# Altium PCB PortalPCB.PcbDoc
Units mm, origin at the board's own origin, x right, y up, seen from the top; angles counter-clockwise.
Board outline 100 x 75 mm, 2 copper layers (Top Layer, Bottom Layer); 103 components, 80 nets, 361 pads, 147 vias.
Unrouted connection lines stored in the file: 197.
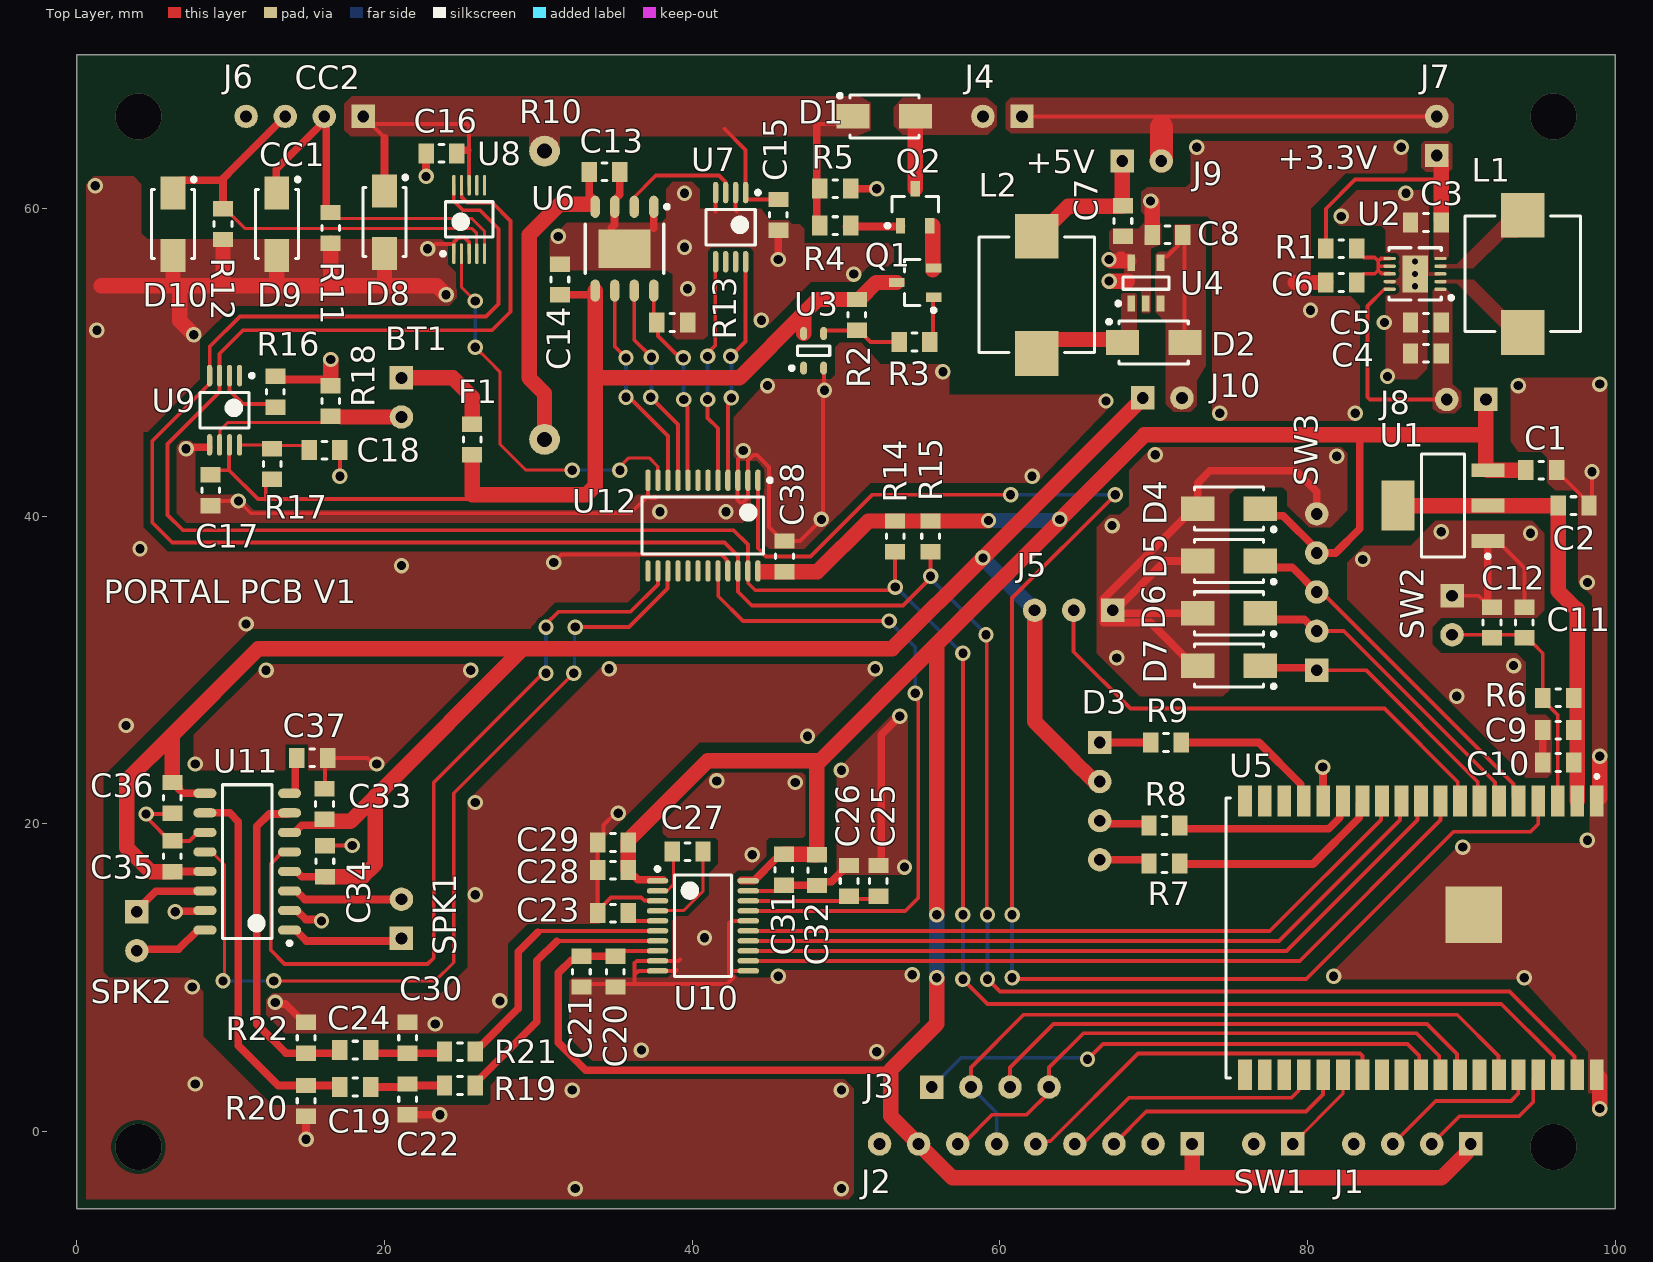
[diagram p0: Top Layer view]
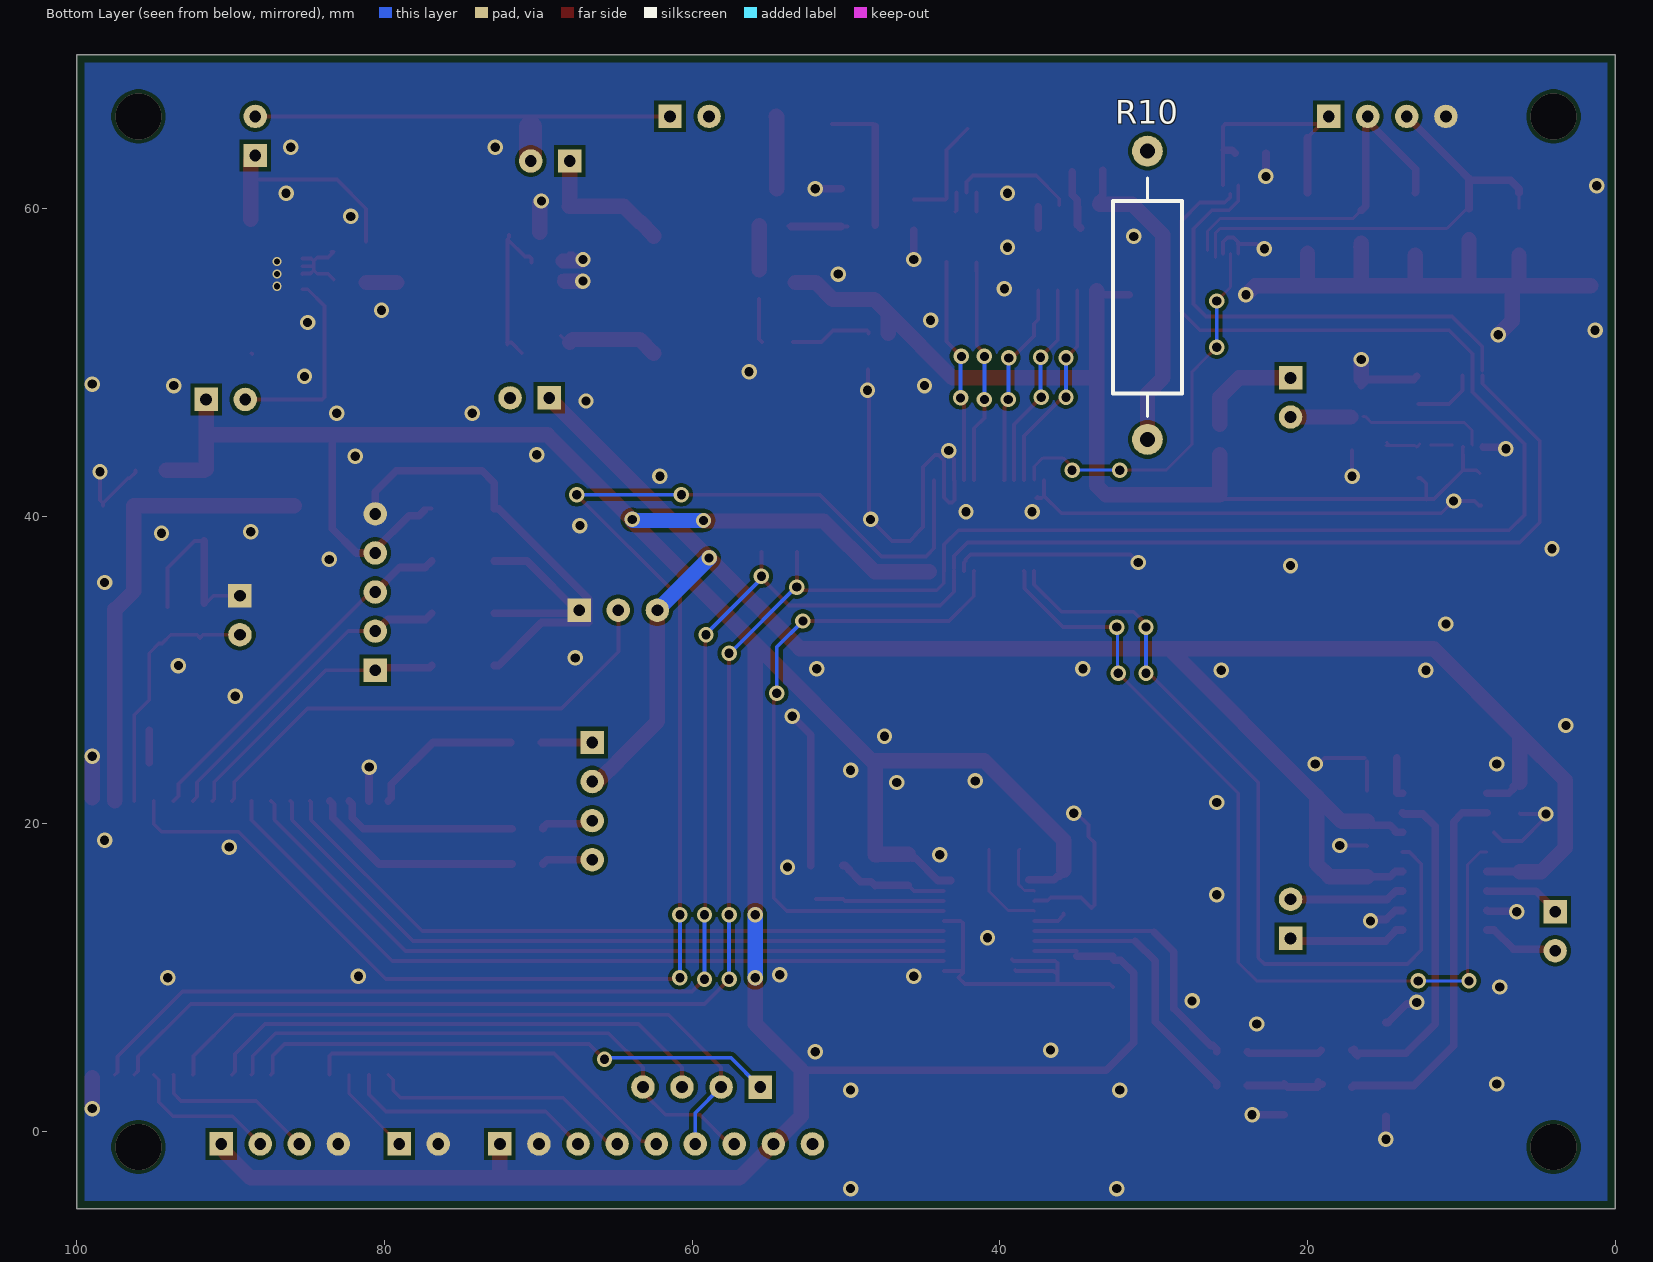
[diagram p1: Bottom Layer view, seen from below]

## Layer stack, top to bottom
Top Solder: solder mask 0.0102, Solder Resist, Dk 3.5
Top Layer: signal copper 0.0356
Dielectric 1: dielectric 0.32, FR-4, Dk 4.8
Bottom Layer: signal copper 0.0356
Bottom Solder: solder mask 0.0102, Solder Resist, Dk 3.5

## Board outline
0,-5 100,-5 100,70 0,70

## Design rules (kind name [scope] priority, off if disabled: settings)
Clearance [All] p1: gap=0.25 ignorepadtopadclearanceinfootprint=FALSE
HoleSize [All] p1: absolutevalues=TRUE maxlimit=6.3 minlimit=0.5 maxpercent=80.000 minpercent=20.000
HoleToHoleClearance [All] p1: gap=0.2 allowstackedmicrovias=TRUE
MinimumSolderMaskSliver [All] p1: minsoldermaskwidth=0.2
PolygonConnect [All] p1: connectstyle=Direct reliefconductorwidth=0.254 reliefentries=4 polygonreliefangle="90 Angle" airgapwidth=0.254
RoutingVias [All] p1: holewidth=0.6 width=1 viastyle="Through Hole" minholewidth=0.15 minwidth=0.25 maxholewidth=0.6 maxwidth=1
SilkToSilkClearance [All] p1: silktosilkclearance=0.2
SilkToSolderMaskClearance [IsPad] p1: minsilkscreentomaskgap=0.2 clearancetoexposedcopper=TRUE
SolderMaskExpansion [All] p1: expansion=0.102 istentingtop=FALSE
SupplyNets "Schematic Supply Nets_6" [InNet('+3.3U')] p1: voltage=0.000
SupplyNets "Schematic Supply Nets_5" [InNet('VBAT')] p2: voltage=0.000
SupplyNets "Schematic Supply Nets_4" [InNet('+5')] p3: voltage=0.000
SupplyNets "Schematic Supply Nets_3" [InNet('GND')] p4: voltage=0.000
SupplyNets "Schematic Supply Nets_2" [InNet('VIN')] p5: voltage=0.000
SupplyNets "Schematic Supply Nets_1" [InNet('+3.3')] p6: voltage=0.000
SupplyNets "Schematic Supply Nets" [InNet('VBUS')] p7: voltage=0.000
Width Width_Power [InNetClass('Power')] p1: maxlimit=1.5 minlimit=0.2 preferedwidth=0.5 minimp=50.000000 maximp=50.000000 favimp=50.000000
Width [All] p2: maxlimit=0.5 minlimit=0.2 preferedwidth=0.25 minimp=50.000000 maximp=50.000000 favimp=50.000000
25 further rules are at their usual default settings.

## Classes and differential pairs
net class Power: +3.3 +3.3U +5 GND NetBT1_1 NetBT1_2 NetC3_2 NetC7_2 NetC13_2 NetD1_2 NetD2_1 NetL1_1 NetL1_2 NetQ1_2 VBAT VIN
component class Power: C1 C2 C3 C4 C5 C6 C7 C8 D1 D2 J4 J7 J8 J9 J10 L1 L2 Q1 Q2 R1 R2 R3 R4 R5 U1 U2 U3 U4
component class Main: C9 C10 C11 C12 C38 D3 D4 D5 D6 D7 J1 J2 J3 J5 R6 R7 R8 R9 R14 R15 SW1 SW2 SW3 U5 U12
component class Battery: BT1 C13 C14 C15 C16 C17 C18 D8 D9 D10 F1 J6 R10 R11 R12 R13 R16 R17 R18 U6 U7 U8 U9
component class Audio: C19 C20 C21 C22 C23 C24 C25 C26 C27 C28 C29 C30 C31 C32 C33 C34 C35 C36 C37 R19 R20 R21 R22 SPK1 SPK2 U10 U11

## Components (designator, comment, footprint, x,y, rotation, side; value= is the part's Value field where it differs from the comment)
BT1 "18650" "1x2 Header" 21.1,49 r270 top
C1 "Capacitor_1uF" "CAP 0805" 95.2,43 r180 top
C2 "Capacitor_4.7uF" "CAP 0805" 97.3,40.7 r180 top
C3 "Capacitor_10uF" "CAP 0805" 87.7,59.1 r0 top
C4 "Capacitor_10uF" "CAP 0805" 87.7,50.6 r0 top
C5 "Capacitor_10uF" "CAP 0805" 87.7,52.6 r0 top
C6 "Capacitor_100nF" "CAP 0805" 82.2,55.2 r0 top
C7 "Capacitor_2.2uF" "CAP 0805" 68,59.2 r90 top
C8 "Capacitor_22uF" "CAP 0805" 70.9,58.3 r0 top
C9 "Capacitor_22uF" "CAP 0805" 96.3,26.1 r0 top
C10 "Capacitor_1uF" "CAP 0805" 96.3,24 r0 top
C11 "Capacitor_1uF" "CAP 0805" 94.1,33.1 r270 top
C12 "Capacitor_100nF" "CAP 0805" 92,33.1 r270 top
C13 "Capacitor_10uF" "CAP 0805" 34.3,62.4 r180 top
C14 "Capacitor_10uF" "CAP 0805" 31.4,55.4 r270 top
C15 "Capacitor_100nF" "CAP 0805" 45.6,59.6 r90 top
C16 "Capacitor_100nF" "CAP 0805" 23.7,63.6 r0 top
C17 "Capacitor_1uF" "CAP 0805" 8.7,41.7 r270 top
C18 "Capacitor_220nF" "CAP 0805" 16.1,44.3 r180 top
C19 "Capacitor_22uF" "CAP 0805" 18.1,2.9 r180 top
C20 "Capacitor_100nF" "CAP 0805" 35,10.4 r270 top
C21 "Capacitor_10uF" "CAP 0805" 32.8,10.4 r270 top
C22 "Capacitor_100nF" "CAP 0805" 21.5,2.1 r90 top
C23 "Capacitor_2.2uF" "CAP 0805" 34.854,14.2 r0 top
C24 "Capacitor_22uF" "CAP 0805" 18.1,5.3 r180 top
C25 "Capacitor_10uF" "CAP 0805" 52.1,16.3 r270 top
C26 "Capacitor_100nF" "CAP 0805" 50.2,16.3 r270 top
C27 "Capacitor_2.2uF" "CAP 0805" 39.7,18.2 r180 top
C28 "Capacitor_100nF" "CAP 0805" 34.854,17 r180 top
C29 "Capacitor_10uF" "CAP 0805" 34.854,18.8 r180 top
C30 "Capacitor_100nF" "CAP 0805" 21.5,6.1 r270 top
C31 "Capacitor_10uF" "CAP 0805" 45.959,17.025 r270 top
C32 "Capacitor_100nF" "CAP 0805" 48.1,17 r270 top
C33 "Capacitor_1uF" "CAP 0805" 16.1,21.3 r270 top
C34 "Capacitor_1uF" "CAP 0805" 16.125,17.575 r270 top
C35 "Capacitor_1uF" "CAP 0805" 6.2,17.9 r270 top
C36 "Capacitor_22uF" "CAP 0805" 6.2,21.7 r90 top
C37 "Capacitor_100nF" "CAP 0805" 15.3,24.3 r180 top
C38 "Capacitor_1uF" "CAP 0805" 46,37.4 r270 top
D1 "Diode_Schottky" DIOM4226X24N 52.5,66 r0 top
D2 "Diode_Schottky" DIOM4226X24N 70,51.3 r0 top
D3 "LED_RGB" 4Pin 66.5,25.3 r270 top
D4 "Diode_TVS_Bi" DIOM4226X24N 74.9,40.5 r180 top
D5 "Diode_TVS_Bi" DIOM4226X24N 74.9,37.1 r180 top
D6 "Diode_TVS_Bi" DIOM4226X24N 74.9,33.7 r180 top
D7 "Diode_TVS_Bi" DIOM4226X24N 74.9,30.3 r180 top
D8 "Diode_TVS_Bi" DIOM4226X24N 20,59.132 r270 top
D9 "Diode_TVS_Bi" DIOM4226X24N 13,59 r270 top
D10 "Diode_TVS_Bi" DIOM4226X24N 6.25,59 r270 top
F1 "Fuse" "RES 0805" 25.7,45 r270 top
J1 "1x4 Header" "1x4 Header" 90.62,-0.8 r180 top
J2 "1x4 Header" "1X9 HEADER" 73.77,-2.07 r180 top
J3 "1x4 Header" "1x4 Header" 55.58,2.9 r0 top
J4 "1x2 Header" 1x2Header 61.44,66 r180 top
J5 "1x3_Header" 1x3Header 67.34,33.9 r180 top
J6 "1x4 Header" "1x4 Header" 18.62,66 r180 top
J7 "1x2 Header" 1x2Header 88.4,63.46 r90 top
J8 "1x2 Header" 1x2Header 91.6,47.6 r180 top
J9 "1x2 Header" 1x2Header 67.96,63.1 r0 top
J10 "1x2 Header" 1x2Header 69.3,47.7 r0 top
L1 "Inductor_2.2uH" INDP7575X45N 93.995,55.763 r270 top
L2 "Inductor_2.2uH" INDP7575X45N 62.4,54.4 r270 top
Q1 "BSS316NH6327XTSA1" SOT95P245X110-3N 54.5,55.2 r180 top
Q2 "DMP2120U" SOT95P245X110-3N 54.5,60.1 r90 top
R1 "Resistor_100" "RES 0805" 82.2,57.4 r180 top
R2 "Resistor_1M" "RES 0805" 50.7,53.1 r270 top
R3 "Resistor_100" "RES 0805" 54.45,51.338 r180 top
R4 "Resistor_100" "RES 0805" 49.3,58.9 r180 top
R5 "Resistor_1M" "RES 0805" 49.3,61.3 r0 top
R6 "Resistor_10k" "RES 0805" 96.3,28.2 r0 top
R7 "Resistor_220" "RES 0805" 70.7,17.43 r180 top
R8 "Resistor_220" "RES 0805" 70.7,19.9 r180 top
R9 "Resistor_220" "RES 0805" 70.8,25.3 r180 top
R10 "Resistor_500m" "Axial Resistor THT" 30.4,45 r90 bottom
R11 "Resistor_5.1k" "RES 0805" 16.5,58.75 r90 top
R12 "Resistor_5.1k" "RES 0805" 9.5,59 r90 top
R13 "Resistor_1M" "RES 0805" 38.7,52.6 r180 top
R14 "Resistor_5.1k" "RES 0805" 53.2,38.7 r90 top
R15 "Resistor_5.1k" "RES 0805" 55.5,38.7 r90 top
R16 "Resistor_200k" "RES 0805" 12.9,48.1 r270 top
R17 "Resistor_1k" "RES 0805" 12.7,43.4 r270 top
R18 "Resistor_10m" "RES 0805" 16.5,47.5 r270 top
R19 "Resistor_100" "RES 0805" 24.9,3 r180 top
R20 "Resistor_100" "RES 0805" 14.9,2 r90 top
R21 "Resistor_100" "RES 0805" 24.9,5.2 r180 top
R22 "Resistor_100" "RES 0805" 14.9,6.1 r270 top
SPK1 "Speaker" 2Pin 21.1,12.56 r90 top
SPK2 "Speaker" 2Pin 3.9,14.3 r270 top
SW1 "Switch_PB" 2Pin 79.04,-0.8 r180 top
SW2 "Switch_PB" 2Pin 89.4,34.84 r270 top
SW3 "Rotary Encoder" "1x5 Header" 80.6,30 r90 top
U1 "LDL1117S" "SOT223 (Custom)" 88.8,40.7 r180 top
U2 "TPS6300x" QFN50P300X300X100_HS-11N 86.995,55.763 r180 top
U3 "XC6120" TSOP130P210X100-4N 47.895,50.763 r90 top
U4 "TPS61322xA" SOT95P280X145-5N 69.495,55.163 r90 top
U5 "ESP32-WROVER-IE" "ESP32 WROVER" 106.31,21.6 r270 top
U6 "TP4056" "SOP-8N w/ Thermal Pad" 35.6,57.4 r270 top
U7 "MCP4011" TSOP65P490X110-8N 42.5,58.8 r270 top
U8 "ADS1115" TSSOP50P490X110-10N 25.5,59.3 r90 top
U9 "STC3100" TSOP65P490X110-8N 9.6,46.9 r270 top
U10 "PCM510xAPWR" TSOP-20 40.699,13.375 r0 top
U11 "PAM8406" SOP-16N 11.075,17.55 r180 top
U12 "TCA9535" TSOP65P640X120-24N 40.7,39.4 r270 top

## Footprints (in the part's own frame and the unit in brackets; to place one, negate y for a bottom-side part, rotate by r counter-clockwise, add the part's x,y. Pads: shape width x height; smd on the part's side, far side on the other; paste and mask are expansions set on the pad)
"1x2 Header" [mil]
  rect 60x60 hole 30: 1(0,0)
  round 60 hole 30: 2(100,0)
1x2Header [mil]
  rect 60x60 hole 30: 1(0,0)
  round 60 hole 30: 2(100,0)
1x3Header [mil]
  rect 60x60 hole 30: 1(0,0)
  round 60 hole 30: 2(100,0) 3(200,0)
"1x4 Header" [mil]
  rect 60x60 hole 30: 1(0,0)
  round 60 hole 30: 2(100,0) 3(200,0) 4(300,0)
"1x5 Header" [mil]
  rect 60x60 hole 30: 1(0,0)
  round 60 hole 30: 2(100,0) 3(200,0) 4(300,0) 5(400,0)
"1X9 HEADER" [mil]
  rect 60x60 hole 30: 1(50,-50)
  round 60 hole 30: 2(150,-50) 3(250,-50) 4(350,-50) 5(450,-50) 6(550,-50) 7(650,-50) 8(750,-50) 9(850,-50)
2Pin [mil]
  rect 60x60 hole 30: 1(0,0)
  round 60 hole 30: 2(100,0)
4Pin [mil]
  rect 60x60 hole 30: 1(0,0)
  round 60 hole 30: 2(100,0) 3(200,0) 4(300,0)
"Axial Resistor THT" [mm]
  round 2 hole 1: 1(0,0) 2(18.75,0)
  silkscreen extent 1.5,-2.25 17,2.25
"CAP 0805" [mm] "Chip Capacitor, 2-Leads, Body 2.00x1.20mm, IPC Medium Density"
  rect 1x1.3 smd mask+0.05: 1(-1,0) 2(1,0)
  silkscreen extent -0.15,-0.58 0.15,0.58, body extent -1,-0.6 1,0.6, height 0.45
DIOM4226X24N [mm] "Molded Diode, 2-Leads, Body 4.15x2.55mm, IPC Medium Density"
  rect 2.15x1.6 smd: 1(-2.032,0) 2(2.032,0)
  silkscreen extent -3.02,-1.4 2.25,1.47, body extent -2.25,-1.4 2.25,1.4, height 2.45
"ESP32 WROVER" [mm]
  rect 2x0.9 smd mask+0.05: 1(0.1,-7.5) 2(0.1,-8.77) 3(0.1,-10.04) 4(0.1,-11.31) 5(0.1,-12.58) 6(0.1,-13.85) 7(0.1,-15.12) 8(0.1,-16.39) 9(0.1,-17.66) 10(0.1,-18.93) 11(0.1,-20.2) 12(0.1,-21.47) 13(0.1,-22.74) 14(0.1,-24.01) 15(0.1,-25.28) 16(0.1,-26.55) 17(0.1,-27.82) 18(0.1,-29.09) 19(0.1,-30.36) 20(17.9,-30.36) 21(17.9,-29.09) 22(17.9,-27.82) 23(17.9,-26.55) 24(17.9,-25.28) 25(17.9,-24.01) 26(17.9,-22.74) 27(17.9,-21.47) 28(17.9,-20.2) 29(17.9,-18.93) 30(17.9,-17.66) 31(17.9,-16.39) 32(17.9,-15.12) 33(17.9,-13.85) 34(17.9,-12.58) 35(17.9,-11.31) 36(17.9,-10.04) 37(17.9,-8.77) 38(17.9,-7.5)
  rect 3.7x3.7 smd: 39(7.5,-15.5)
  silkscreen extent -1.6,-31.6 18.1,-7.4, body extent 0,-31.5 18,0, height 3.3
INDP7575X45N [mm] "Precision Wire Wound Inductor, 2-Leads, Body 7.50x7.50mm, IPC Medium Density"
  rect 2.9x2.8 smd: 1(-3.81,0) 2(3.81,0)
  silkscreen extent -3.75,-3.75 3.75,3.75, body extent -3.75,-3.75 3.75,3.75, height 4.5
QFN50P300X300X100_HS-11N [mm] "QFN, 10-Leads, Body 3.00x3.00mm, Pitch 0.50mm, Thermal Pad 1.65x2.40mm, IPC Medium Density"
  oval 0.8x0.22 smd mask+0.04: 1(-1.65,1) 2(-1.65,0.5) 3(-1.65,0) 4(-1.65,-0.5) 5(-1.65,-1) 6(1.65,-1) 7(1.65,-0.5) 8(1.65,0) 9(1.65,0.5) 10(1.65,1)
  rect 1.65x2.4 smd mask+0.1: 11(0,0)
  silkscreen extent -2.48,-1.7 1.7,1.7, body extent -1.55,-1.55 1.55,1.55, height 1
"RES 0805" [mm] "Chip Resistor, 2-Leads, Body 2.00x1.20mm, IPC Medium Density"
  rect 1x1.3 smd mask+0.05: 1(-1,0) 2(1,0)
  silkscreen extent -0.15,-0.58 0.15,0.58, body extent -1,-0.6 1,0.6, height 0.45
"SOP-8N w/ Thermal Pad" [mm] "SOP, 8-Leads, Body 4.90x3.90mm, Pitch 1.27mm, Thermal Pad 3.41x2.52mm, IPC Medium Density"
  oval 1.45x0.6 smd: 1(-2.725,1.905) 2(-2.725,0.635) 3(-2.725,-0.635) 4(-2.725,-1.905) 5(2.725,-1.905) 6(2.725,-0.635) 7(2.725,0.635) 8(2.725,1.905)
  rect 2.52x3.41 smd: 9(0,0)
  silkscreen extent -2.85,-2.55 1.6,2.88, body extent -2,-2.55 2,2.55, height 1.75
SOP-16N [mm] "SOP, 16-Leads, Body 9.90x3.90mm, Pitch 1.27mm, IPC Medium Density"
  oval 1.5x0.6 smd: 1(-2.75,4.445) 2(-2.75,3.175) 3(-2.75,1.905) 4(-2.75,0.635) 5(-2.75,-0.635) 6(-2.75,-1.905) 7(-2.75,-3.175) 8(-2.75,-4.445) 9(2.75,-4.445) 10(2.75,-3.175) 11(2.75,-1.905) 12(2.75,-0.635) 13(2.75,0.635) 14(2.75,1.905) 15(2.75,3.175) 16(2.75,4.445)
  silkscreen extent -2.88,-5 1.6,5.42, body extent -2,-5 2,5, height 1.75
SOT95P245X110-3N [mm] "SOT23, 3-Leads, Body 2.90x2.45mm, Pitch 0.95mm, IPC Medium Density"
  rect 1x0.6 smd: 1(-1.2,0.95) 2(-1.2,-0.95) 3(1.2,0)
  silkscreen extent -1.33,-1.5 0.7,1.92, body extent -0.7,-1.5 0.7,1.5, height 1.1
SOT95P280X145-5N [mm] "SOT23, 5-Leads, Body 2.95x2.80mm, Pitch 0.95mm, IPC Medium Density"
  rect 1.05x0.5 smd mask+0.05: 1(-1.325,0.95) 2(-1.325,0) 3(-1.325,-0.95) 4(1.325,-0.95) 5(1.325,0.95)
  silkscreen extent -1.45,-1.5 0.4,1.92, body extent -0.8,-1.47 0.8,1.48, height 1.45
"SOT223 (Custom)" [mm] "SOT223, 4-Leads, Body 6.50x7.00mm (avg), Pitch 2.30mm, IPC Medium Density"
  rect 2.15x0.9 smd: 1(-2.925,2.3) 2(-2.925,0) 3(-2.925,-2.3)
  rect 2.15x3.25 smd: 2(2.925,0)
  silkscreen extent -3.05,-3.35 1.4,3.42, body extent -1.85,-3.35 1.85,3.35, height 1.8
TSOP65P490X110-8N [mm] "TSOP, 8-Leads, Body 3.00x2.95mm, Pitch 0.65mm, IPC Medium Density"
  oval 1.4x0.35 smd mask+0.05: 1(-2.25,0.975) 2(-2.25,0.325) 3(-2.25,-0.325) 4(-2.25,-0.975) 5(2.25,-0.975) 6(2.25,-0.325) 7(2.25,0.325) 8(2.25,0.975)
  silkscreen extent -2.37,-1.6 1.15,1.9, body extent -1.55,-1.6 1.55,1.6, height 1.1
TSOP65P640X120-24N [mm] "TSOP, 24-Leads, Body 7.80x4.40mm, Pitch 0.65mm, IPC Medium Density"
  oval 1.4x0.35 smd mask+0.05: 1(-2.95,3.575) 2(-2.95,2.925) 3(-2.95,2.275) 4(-2.95,1.625) 5(-2.95,0.975) 6(-2.95,0.325) 7(-2.95,-0.325) 8(-2.95,-0.975) 9(-2.95,-1.625) 10(-2.95,-2.275) 11(-2.95,-2.925) 12(-2.95,-3.575) 13(2.95,-3.575) 14(2.95,-2.925) 15(2.95,-2.275) 16(2.95,-1.625) 17(2.95,-0.975) 18(2.95,-0.325) 19(2.95,0.325) 20(2.95,0.975) 21(2.95,1.625) 22(2.95,2.275) 23(2.95,2.925) 24(2.95,3.575)
  silkscreen extent -3.07,-3.95 1.85,4.47, body extent -2.25,-3.95 2.25,3.95, height 1.2
TSOP130P210X100-4N [mm] "TSOP, 4-Leads, Body 2.00x1.25mm, Pitch 1.30mm, IPC Medium Density"
  oval 0.85x0.45 smd: 1(-1.125,0.65) 2(-1.125,-0.65) 3(1.125,-0.65) 4(1.125,0.65)
  silkscreen extent -1.25,-1.05 0.3,1.55, body extent -0.7,-1.05 0.7,1.05, height 1
TSOP-20 [mm] "TSOP, 20-Leads, Body 6.50x4.40mm, Pitch 0.65mm, IPC Medium Density"
  oval 1.4x0.35 smd mask+0.05: 1(-2.95,2.925) 2(-2.95,2.275) 3(-2.95,1.625) 4(-2.95,0.975) 5(-2.95,0.325) 6(-2.95,-0.325) 7(-2.95,-0.975) 8(-2.95,-1.625) 9(-2.95,-2.275) 10(-2.95,-2.925) 11(2.95,-2.925) 12(2.95,-2.275) 13(2.95,-1.625) 14(2.95,-0.975) 15(2.95,-0.325) 16(2.95,0.325) 17(2.95,0.975) 18(2.95,1.625) 19(2.95,2.275) 20(2.95,2.925)
  silkscreen extent -3.07,-3.3 1.85,3.82, body extent -2.25,-3.3 2.25,3.3, height 1.2
TSSOP50P490X110-10N [mm] "TSSOP, 10-Leads, Body 3.00x3.00mm, Pitch 0.50mm, IPC Medium Density"
  oval 1.35x0.22 smd mask+0.04: 1(-2.225,1) 2(-2.225,0.5) 3(-2.225,0) 4(-2.225,-0.5) 5(-2.225,-1) 6(2.225,-1) 7(2.225,-0.5) 8(2.225,0) 9(2.225,0.5) 10(2.225,1)
  silkscreen extent -2.35,-1.55 1.15,1.82, body extent -1.55,-1.55 1.55,1.55, height 1.1

## Part data
C1 C10 C11 C17 C33 C34 C35 C38: Capacitance=1uF
C2: Capacitance=4.7uF
C3 C4 C5 C13 C14 C21 C25 C29 C31: Capacitance=10uF
C6 C12 C15 C16 C20 C22 C26 C28 C30 C32 C37: Capacitance=100nF
C7 C23 C27: Capacitance=2.2uF
C8 C9 C19 C24 C36: Capacitance=22uF
C18: Capacitance=220nF
J1 J6: library part 1x4_Header
J2: library part "1x9_Header TFT Screen"
J3: library part "1x4_Header SD Card"
J4 J7 J8 J9 J10: library part 1x2_Header
J5: library part "1x3_Header WS2812B"
L1 L2: Inductance=2.2uH
Q1: "N-Channel MOSFET"
Q2: "P-Channel MOSFET"
R1 R3 R4 R19 R20 R21 R22: Resistance=100
R2 R5 R13: Resistance=1M
R6: Resistance=10k
R7 R8 R9: Resistance=220
R10: Resistance=500m
R11 R12 R14 R15: Resistance=5.1k
R16: Resistance=200k
R17: Resistance=1k
R18: Resistance=10m
U1: "LDO Linear Regulator"
U2: "Buck-Boost Converter"
U3: "Voltage Supervisor"
U4: "Boost Converter"
U7: "Digital POT"
U8: "16-bit, ADC, I2C"
U12: "I2C GPIO Expander"

## Via types
v1: diameter 1, hole 0.6, Top Layer to Bottom Layer, 140 vias
v2: diameter 3, hole 3, Top Layer to Bottom Layer, 4 vias
v3: diameter 0.6, hole 0.4, Top Layer to Bottom Layer, 3 vias

## Nets (pads, with @x,y where several pads share a name; then routed paths per layer and width w, separated by ;. In a path a pad name is that pad's centre, name@x,y a point inside that pad or via, vN(x,y) a via of type N, cw(c..) or ccw(c..) an arc to the next point about the centre after c; other vN are vias at no path point)
+3.3: C1.2 C20.1 C21.1 C28.1 C29.1 C31.1 C32.1 C38.2 D4.1 J1.1 J2.1 J2.8 J8.1 R14.2 R15.2 SW3.4 U1.3 U10.1 U10.8 U10.20 U12.24 | length 233.8
  Top Layer w0.25: C20.1@35,11.75 U10.8 ; D4.1 77.3,40.5 D4.1@77.4,40.4
  Top Layer w0.5: C21.1@32.65,11.4 C20.1 ; C21.1 32.55,11.15 32.137,11.15 31.3,10.313 31.3,5.793 33.093,4 52.9,4 ; C28.1 35.854,16.85 36.104,16.6 36.254,16.6 36.479,16.375 U10.1@38.112,16.375 ; U10.20@43.191,16.325 44.025,16.325 45.475,17.775 45.709,17.775 C31.1 ; D4.1@77.4,40.4 77.4,40.398 77.757,40.041 78.408,40.041 80.6,37.849 SW3.4 81.82,37.62 83.4,39.2 83.4,45.3
  Top Layer w1: C28.1 35.854,18.65 C29.1 35.854,18.95 41.004,24.1 48.3,24.1 ; 44.6,36.4 C38.2 48.15,36.4 51.45,39.7 R14.2 R15.2 59.232,39.7 v1(59.266,39.734) ; C31.1 47.925,18.025 47.95,18 C32.1 48.1,23.9 55.9,31.7 ; v1(55.9,10) 55.9,7 52.9,4 52.9,3 52.9,2.6 52.9,1.02 56.92,-3 72.5,-3 ; v1(55.9,14.1) 55.9,31.7 ; v1@63.9,39.7 55.9,31.7 ; v1(63.9,39.8) 69.4,45.3 83.4,45.3 91.6,45.3 ; J2.1 72.5,-3 ; J1.1 90.358,-1.062 90.358,-1.342 88.7,-3 72.5,-3 ; 91.6,43.575 91.6,43.05 91.675,43.05 U1.3 C1.2 ; 91.6,43.675 91.6,45.3 ; J8.1 91.6,45.3
  Bottom Layer w1: v1(55.9,10) v1(55.9,14.1) ; v1(59.266,39.734) 63.834,39.734 v1(63.9,39.8)
+3.3U: C2.2 C9.2 C10.2 R6.2 U1.2 U5.2 | length 30.1
  Top Layer w1: U1.2@85.875,40.7 91.725,40.7 C2.2 96.3,35.15 97.5,33.95 ; U5.2 97.54,33.95
+5: C33.2 C34.2 C35.2 C36.2 D3.2 J5.3 J10.1 U11.4 U11.6 U11.9 U11.13 | length 140.8
  Top Layer w0.5: C36.2 6.35,22.7 6.6,22.45 6.6,22.3 6.905,21.995 U11.9 ; C35.2@6.215,16.915 U11.13 ; U11.4 14.278,16.915 14.618,16.575 C34.2 ; U11.6 14.248,19.455 14.294,19.501 14.294,19.601 14.618,19.925 15.875,19.925 C33.2@16.125,20.175
  Top Layer w1: C35.2 4.8,16.9 3.25,18.45 3.25,22.85 6.2,25.8 ; C36.2 6.2,25.8 ; C34.2 18.575,16.575 19.4,17.4 19.4,21.8 ; C33.2@16.125,20.175 17.775,20.175 19.4,21.8 ; J5.3@62.26,34.142 62.26,26.66 64.89,24.03 64.89,23.985 65.329,23.546 65.374,23.546 D3.2@66.402,22.518 ; J10.1 v1(58.9,37.3) 53,31.4 29,31.4 ; 6.2,25.8 11.8,31.4 29,31.4 ; 19.4,21.8 29,31.4
  Bottom Layer w1: v1(58.9,37.3) 58.9,37.26 J5.3
ALERT: U8.2 U12.11 | length 26
  Top Layer w0.2: U8.2 25,54.9 v1(25.9,54) ; v1(25.9,51) 26.832,50.068 27.5,49.4 27.5,44.7 29.2,43 v1(32.2,43) ; v1(35.3,43) 35.3,43.216 35.884,43.8 37.2,43.8 37.764,43.236 37.764,42.361 U12.11
  Bottom Layer w0.2: v1(25.9,51) v1(25.9,54) ; v1(32.2,43) v1(35.3,43)
AMP_M\U\T\E\: U11.12 U12.15 | length 58
  Top Layer w0.2: U11.12 8.775,18.185 9.6,17.36 9.6,9.9 v1(9.5,9.8) ; v1(12.8,9.8) 23.3,9.8 24.5,11 24.5,22 v1(32.3,29.8)
  Top Layer w0.25: v1(32.4,32.8) 35.9,32.8 38.4,35.3 38.4,36.425 U12.15
  Bottom Layer w0.2: v1(9.5,9.8) v1(12.8,9.8) ; v1(32.3,29.8) 32.35,29.85 32.35,32.75 v1(32.4,32.8)
AMP_S\H\D\N\: U11.5 U12.14 | length 52.4
  Top Layer w0.25: U11.5 13.375,18.185 12.6,17.41 12.6,11.8 13.5,10.9 22.8,10.9 23.2,11.3 23.2,22.7 30.3,29.8 v1(30.5,29.8) ; v1(30.5,32.8) 30.5,33 31.3,33.8 36,33.8 37.775,35.575 U12.14
  Bottom Layer w0.25: v1(30.5,29.8) v1(30.5,32.8)
BAT_CE: R13.2 U6.8 U12.8 | length 13.4
  Top Layer w0.25: U6.8 37.505,52.795 37.779,52.521 37.779,51.721 38.981,50.519 39.003,50.519 39.222,50.3 v1(39.425,50.3) ; v1(39.45,47.6) 39.45,47.397 39.644,47.204 39.644,47.135 39.7,47.079 39.7,46.8 39.706,46.794 39.706,42.369 U12.8
  Bottom Layer w0.25: v1(39.425,50.3) 39.438,50.288 39.438,47.612 v1(39.45,47.6)
BAT_CHRG: U6.7 U12.9 | length 13.5
  Top Layer w0.25: U6.7 36.235,51.465 v1(37.35,50.35) ; v1(37.3,47.75) 39.075,45.975 U12.9
  Bottom Layer w0.25: v1(37.3,47.75) 37.35,47.8 v1(37.35,50.35)
BAT_STDBY: U6.6 U12.10 | length 13.9
  Top Layer w0.25: U6.6 34.965,51.035 v1(35.7,50.3) ; v1(35.7,47.75) 35.9,47.75 38.425,45.225 U12.10
  Bottom Layer w0.25: v1(35.7,47.75) v1(35.7,50.3)
BOOT: SW1.1 U5.25 | length 5.9
  Top Layer w0.2: SW1.1 82.3,2.46 U5.25
CC1: D10.1 J6.3 R12.2 U8.4 | length 31.2
  Top Layer w0.2: D10.1@6.25,60.032 D10.1 ; R12.2 9.65,60 10.95,58.7 25.7,58.7 25.985,58.415 U8.4@25.985,56.825
  Top Layer w0.5: D10.1 6.25,61.307 6.8,61.857 7.09,61.857 7.093,61.86 9.4,61.86 9.5,61.96 ; R12.2 9.5,61.96 ; J6.3 10.27,62.73 9.5,61.96
CC2: D9.1 J6.2 R11.2 U8.5 | length 24.4
  Top Layer w0.2: R11.2@16.5,59.9 17.05,59.35 25.686,59.35 26.5,58.536 U8.5@26.5,57.275
  Top Layer w0.5: D9.1 12.964,61.068 12.964,62.564 15.884,65.484 15.884,65.804 J6.2 16.22,65.86 16.22,60.15 16.47,59.9 R11.2@16.5,59.9
DAC_MUTE: U10.17 U12.20 | length 43.6
  Top Layer w0.25: U12.20 41.694,36.431 41.694,34.806 43.3,33.2 v1(52.8,33.2) ; U10.17 53.85,14.35 54.7,15.2 54.7,27.979 54.644,28.035 54.644,28.356 v1(54.5,28.5)
  Bottom Layer w0.25: v1(52.8,33.2) 54.5,31.5 v1(54.5,28.5)
DISPLAY_CS: J2.3 U5.24 | length 16.2
  Top Layer w0.25: J2.3 69.52,1.3 79.9,1.3 81.021,2.421 81.021,3.691 U5.24
DISPLAY_DC: J2.5 U5.26 | length 25
  Top Layer w0.25: J2.5 62.514,-0.626 63.274,-0.626 68.975,5.075 83.424,5.075 83.57,4.929 U5.26
DISPLAY_RESET: J2.4 U5.23 | length 17.2
  Top Layer w0.25: J2.4 65.124,-0.556 65.644,-0.556 68.4,2.2 78.97,2.2 79.435,2.665 79.435,3.375 U5.23
EN: C11.2 C12.2 R6.1 SW2.2 U5.3 | length 16.6
  Top Layer w0.25: SW2.2 91.8,32.3 C12.2 92.2,32.3 93.9,32.3 94.475,31.725 94.675,31.725 95.3,31.1 95.3,30.05 R6.1 95.3,28.05 96.27,27.08 U5.3
GND: C1.1 C2.1 C3.1 C4.1 C5.1 C6.1 C7.1 C8.1 C9.1 C10.1 C11.1 C12.1 C13.1 C14.1 C15.1 C16.1 C17.2 C18.1 C20.2 C21.2 C22.1 C23.1 C25.1 C26.1 C28.2 C29.2 C30.1 C31.2 C32.2 C33.1 C34.1 C35.1 C36.1 C37.1 C38.1 D4.2 D5.2 D6.2 D7.2 D8.2 D9.2 D10.2 J1.4 J2.2 J5.1 J6.4 R5.2 R11.1 R12.1 R13.1 R16.1 R18.1 R20.1 R22.1 SW1.2 SW2.1 SW3.5 U1.1 U2.3 U2.9 U2.11 U3.2 U4.2 U4.5 U5.1 U5.15 U5.38 U5.39 U6.1 U6.3 U6.9 U7.2 U7.4 U8.1 U8.3 U9.5 U10.3 U10.9 U10.10 U10.11 U10.16 U10.19 U11.2 U11.11 U11.15 U12.2 U12.3 U12.12 U12.21 | length 286.9
  Top Layer w0.25: v1(4.5,20.65) v1@4.65,20.65 ; C36.1 6.15,20.65 v1@4.65,20.65 ; U11.11@7.875,19.455 7.32,18.9 C35.1 6.05,18.9 4.645,20.305 4.645,20.645 v1@4.65,20.65 ; U9.5@8.579,44.5 8.625,44.546 U9.5 ; C17.2 8.85,40.7 9.15,41 v1(10.5,41) 11.3,40.2 36,40.2 37.125,41.325 U12.12 ; C34.1 16.15,18.6 v1(17.9,18.6) ; C33.1@16.125,22.175 C37.1@16.125,24.075 ; C37.1 18.897,24.3 19.297,23.9 v1(19.5,23.9) ; R18.1 R18.1@16.5,48.95 ; v1(17.1,42.6) C18.1 ; v1(22.8,57.4) 23.003,57.4 23.303,57.7 24.5,57.7 U8.1 ; U8.1@24.5,57.664 24.515,57.679 24.515,57.841 24.799,58.125 25.201,58.125 25.485,57.841 25.485,57.6 25.5,57.585 U8.3 ; v1(31,37) 31,37.02 31.505,37.525 41.903,37.525 42.225,37.203 42.225,37.102 42.325,37.002 U12.21 ; C21.2@32.654,9.4 32.854,9.6 36.254,9.6 ; v1(35.2,20.7) 35,20.7 34.229,19.929 34.229,19.175 C29.2 C28.2 33.854,14.725 34.03,14.548 34.052,14.548 34.729,15.225 36.675,15.225 36.881,15.019 37.729,15.019 U10.3 ; 37.3,41.2 37.622,41.2 37.547,41.275 ; 39,10.5 38.95,10.45 U10.10 36.504,10.45 36.254,10.2 ; 39.2,11.2 39.1,11.1 U10.9 36.4,11.1 36.254,10.954 36.254,10.2 ; 41.5,59.8 41.525,59.825 U7.4 ; U7.2 42.825,59.875 42.9,59.8 ; v1(43.325,44.275) 43.325,44.072 42.975,43.722 U12.3 42.956,42.331 42.956,41.056 43.102,40.909 43.309,40.909 43.625,41.225 U12.2 43.625,43.625 43.996,43.996 44.204,43.996 45,43.2 45,39.3 45.475,38.825 45.475,38.775 45.85,38.4 47,38.4 48.5,39.9 48.5,48.1 v1(48.6,48.2) 48.573,48.227 48.573,49.554 U3.2@48.57,49.556 ; U10.11 42.526,10.45 42.4,10.324 ; U10.16 42.546,13.7 42.4,13.554 42.4,10.324 ; U10.19 45.584,15.65 C31.2 ; 67.737,57.1 68,57.1 ; C8.1 C8.1@70,58.4 ; 79.1,55.3 79.2,55.2 ; SW2.1 91.11,34.84 C12.1@91.662,34.288 ; U1.1 92.35,38.4 94.1,36.65 C11.1 ; C1.1 96.2,42.85 96.575,42.475 96.675,42.475 C2.1@98.3,40.85 ; C2.1 C2.1@98.3,40.85 ; v1(98.5,42.9) 98.5,41.05 C2.1@98.3,40.85 ; U5.38 U5.38@99,3.51 ; U5.1 U5.1@99,21.69 ; 36.254,9.6 36.254,10.2 ; 36.254,9.6 42.274,9.6 42.699,10.025 42.4,10.324
  Top Layer w0.254: R11.1@16.5,57.5 16.9,57.5 R11.1@16.65,57.75
  Top Layer w0.5: v1(6.4,14.3) 6.437,14.337 8.287,14.337 U11.15 ; v1(7.1,44.4) 7.196,44.496 8.574,44.496 U9.5@8.579,44.5 ; v1(12.9,8.4) 12.996,8.304 13.546,8.304 14.75,7.1 R22.1 ; R16.1 13.1,48.9 16.1,48.9 R18.1 ; U11.2 14.302,14.375 14.881,13.796 15.804,13.796 v1(15.9,13.7) ; v1(14.9,-0.5) R20.1 ; C22.1 v1(23.6,1.1) ; v1(22.7,62.1) C16.1 ; 34.75,58.75 34.946,58.946 34.946,60.106 U6.3 34.965,60.577 35.3,60.912 C13.1 ; 37.5,58.75 37.505,58.755 U6.1 ; v1(45.6,56.7) C15.1 ; C31.2 45.971,16.013 48.087,16.013 C32.2 48.35,16.25 49.057,16.25 49.8,16.993 49.8,17.05 50.05,17.3 C26.1 ; R5.2 v1(52,61.3) ; C25.1@52.3,17.3 52.3,25.8 v1(53.5,27) ; 68.296,55.296 68.5,55.5 ; C8.1@69.9,58.5 C8.1@70,58.4 ; D7.2 72.593,30.3 69.793,33.1 66.74,33.1 66.74,34.647 72.593,40.5 D4.2 72.868,42.168 73.66,42.96 79.24,42.96 80.6,41.6 SW3.5 ; D6.2 67.34,33.7 70.74,37.1 D5.2 ; v1(81,23.7) 81.015,23.685 81.015,21.515 U5.15 ; C12.1@91.725,34.35 U1.1 ; C10.1 C9.1
  Top Layer w1: 1.586,54.986 6.25,54.986 ; D10.2 6.25,54.986 ; 6.677,54.986 6.677,52.723 v1(7.6,51.8) ; 9.5,55.4 R12.1 ; D9.2 12.986,56.954 12.986,54.986 ; R18.1@16.5,48.95 v1(16.5,50.2) ; R11.1 16.5,54.986 ; D8.2 20,54.986 ; v1(24,54.4) 23.414,54.986 20,54.986 ; v1(67.1,56.7) 67.2,56.6 68,56.6 U4.5@68.4,56.6 ; v1(67.104,55.296) 68.296,55.296 ; v1(69.8,60.5) 69.9,60.4 C8.1@69.9,58.45 ; 79.2,55.2 C6.1 ; v1(99,1.5) U5.38@99,3.51 ; U5.1@99,21.69 v1(99,24.4) ; 6.25,54.986 12.986,54.986 ; 12.986,54.986 16.5,54.986 ; 16.5,54.986 20,54.986
  other v1: 32.4,-3.7 49.7,-3.7 32.2,2.7 49.7,2.7 7.7,3.1 52,5.2 36.7,5.3 23.3,7 27.5,8.5 7.5,9.4 94.1,10 45.6,10.1 81.7,10.1 54.3,10.2 40.8,12.6 25.9,15.4 53.8,17.2 43.9,18 90.1,18.5 98.2,18.937 25.9,21.4 46.7,22.7 41.6,22.8 49.7,23.5 7.7,23.9 47.5,25.7 3.2,26.4 89.7,28.3 12.3,30 25.6,30 34.6,30.1 51.9,30.1 93.4,30.3 67.6,30.8 11,33 98.2,35.7 21.1,36.8 83.6,37.2 4.1,37.9 94.5,38.9 88.7,39 67.3,39.4 48.4,39.8 37.9,40.3 42.2,40.3 62.1,42.6 81.9,43.9 70.1,44 74.3,46.7 83.1,46.7 66.9,47.5 44.9,48.5 93.7,48.5 99,48.6 85.2,49.1 56.3,49.4 1.3,52.1 85,52.6 44.5,52.75 80.2,53.4 39.7,54.8 50.5,55.75 39.5,57.5 31.3,58.2 82.2,59.5 39.5,61 86.4,61 1.2,61.5 72.8,64 86.1,64
  other v3: 86.995,54.963 86.995,55.763 86.995,56.563
I2S_BCK: U5.10 U10.13 | length 48.4
  Top Layer w0.25: U10.13 78.64,11.75 87.161,20.271 87.161,21.281 U5.10
I2S_DIN: U5.11 U10.14 | length 46.9
  Top Layer w0.25: U10.14 78.149,12.4 86.021,20.271 86.021,21.411 U5.11
I2S_LRCK: U5.12 U10.15 | length 45.4
  Top Layer w0.25: U10.15 77.55,13.05 84.771,20.271 84.771,21.431 U5.12
I2S_SCK: U5.9 U10.12 | length 50
  Top Layer w0.25: U10.12 79.5,11.1 88.65,20.25 U5.9
I\N\T\: U5.4 U12.1 | length 103.6
  Top Layer w0.25: U12.1 44.275,37.925 44.8,37.4 47.7,37.4 51.7,41.4 v1(60.7,41.4) ; v1(60.8,10) 60.875,9.925 79.925,9.925 89.5,19.5 94.5,19.5 95,20 U5.4 ; v1(60.8,14.1) 60.8,34.7 v1(67.5,41.4)
  Bottom Layer w0.25: v1(60.7,41.4) v1(67.5,41.4) ; v1(60.8,10) v1(60.8,14.1)
INL: C24.2 R22.2 U11.7 | length 22.1
  Top Layer w0.5: U11.7 13.751,20.651 12.501,20.651 11.7,19.85 11.7,7 13.6,5.1 R22.2 16.85,5.1 16.974,5.224 C24.2@16.974,5.35 ; C24.2@16.75,4.95 C24.2
INR: C19.2 R20.2 U11.10 | length 24.7
  Top Layer w0.5: U11.10 9.925,20.725 10.5,20.15 10.5,5.6 13.1,3 17.004,3 C19.2@17.104,2.9
LED_B: R7.1 U5.13 | length 14.1
  Top Layer w0.5: R7.1@71.7,17.4 80.357,17.4 83.37,20.413 83.37,21.3 U5.13
LED_DIN: J5.2 U5.8 | length 32.6
  Top Layer w0.25: J5.2@64.8,34.036 64.8,31.2 68.5,27.5 85,27.5 89.771,22.729 89.771,21.649 U5.8
LED_G: R8.1 U5.14 | length 11.9
  Top Layer w0.5: R8.1@71.7,19.7 81.387,19.7 82.1,20.413 82.1,21.3 U5.14
LED_R: R9.1 U5.16 | length 10.1
  Top Layer w0.5: R9.1 76.847,25.3 79.56,22.587 79.56,21.7 U5.16
NetBT1_1: BT1.1 F1.1 | length 6.9
  Top Layer w1: BT1.1 24.45,49 25.7,47.75 F1.1
NetBT1_2: BT1.2 R18.2 U9.6 | length 12.3
  Top Layer w0.2: U9.6 9.304,44.679 9.304,45.604 9.8,46.1 15.85,46.1 16.25,46.5 R18.2@16.4,46.5
  Top Layer w1: 17.195,46.46 BT1.2
NetC3_2: C3.2 J7.1 R1.2 U2.5 | length 14.3
  Top Layer w0.25: R1.2@81.2,57.856 81.2,60 83.1,61.9 88.7,61.9
  Top Layer w1: C3.2@88.7,59.3 88.7,61.9 J7.1@88.7,63.16
NetC4_2: C4.2 C5.2 J8.2 U2.1 U2.10 | length 13.1
  Top Layer w0.25: U2.10 84.995,54.763 83.9,53.668 83.9,47.746 84.046,47.6 J8.2 ; C4.2@88.595,50.556 C4.2@88.645,50.606
NetC6_2: C6.2 R1.1 U2.6 U2.7 U2.8 | length 6.3
  Top Layer w0.25: C6.2@83.3,55.4 83.675,55.775 84.375,55.775 84.6,56 ; R1.1@83.45,57.2 83.3,57.2 83.375,57.125 83.675,56.825 84.375,56.825 84.6,56.6 ; U2.8 85.33,55.778 84.822,55.778 84.6,56 ; U2.7 84.637,56.263 84.6,56.3 ; U2.6 84.763,56.763 84.6,56.6 ; 84.6,56 84.6,56.3 ; 84.6,56.3 84.6,56.6
NetC7_2: C7.2 J9.1 L2.1 | length 9.3
  Top Layer w1: L2.1@62.5,58.21 62.5,58.26 63.4,59.16 63.45,59.16 64.453,60.163 C7.2@67.995,60.163 ; C7.2@67.96,60.163 J9.1
NetC8_2: C8.2 D2.2 J10.2 U4.3 U4.4 | length 10.6
  Top Layer w0.25: U4.4 70.445,56.763 70.57,56.888 70.87,56.888 71.995,58.013 71.995,51.195 D2.2@72.027,51.163 ; D2.2@71.082,50.625 71.757,51.3 D2.2 ; C8.2@71.9,58.15 C8.2
NetC13_2: C13.2 R10.1 U6.4 | length 21.2
  Top Layer w0.5: C13.2@33.3,62.5 33.3,60.893 33.593,60.6 33.618,60.6 33.695,60.523 U6.4
  Top Layer w1: R10.1 30.4,48.002 29.4,49.002 29.4,58.3 31.4,60.3 U6.4@33.52,60.3
NetC18_2: C18.2 R17.1 U9.8 | length 3.7
  Top Layer w0.2: U9.8@10.575,44.643 11.997,44.643 ; R17.1@12.7,44.7 R17.1@12.9,44.5 ; R17.1@13,44.6 C18.2@14.9,44.6 ; C18.2@14.759,44.727 C18.2@14.845,44.813
NetC19_1: C19.1 C22.2 R19.2 | length 5
  Top Layer w0.5: C19.1@19.299,3.225 19.299,2.951 19.35,2.9 21.3,2.9 C22.2 21.6,3 R19.2
NetC23_2: C23.2 U10.5 | length 2.2
  Top Layer w0.25: C23.2 35.854,14.075 36.229,13.7 U10.5
NetC24_1: C24.1 C30.2 R21.2 | length 4.9
  Top Layer w0.5: C24.1 19.3,5.1 23.8,5.1 R21.2
NetC25_2: C25.2 C26.2 U10.18 | length 8.4
  Top Layer w0.25: U10.18 50.074,15 50.199,15.125 C25.2@51.949,15.125
NetC27_1: C27.1 U10.4 | length 6.2
  Top Layer w0.2: U10.4 37.777,14.379 39.452,14.379 40.699,15.625 C27.1@40.699,18.375
NetC27_2: C27.2 U10.2 | length 3.6
  Top Layer w0.2: U10.2 37.777,15.679 38.395,15.679 38.799,16.083 38.799,18.275 C27.2@38.699,18.375
NetC37_2: C37.2 U11.8 | length 2.7
  Top Layer w0.5: U11.8 14.154,21.995 14.2,22.041 C37.2@14.2,24.3
NetD1_2: D1.2 J4.2 Q2.3 | length 4.7
  Top Layer w1: Q2.3 54.5,65.968 D1.2
NetD2_1: D2.1 L2.2 U4.1 | length 6.8
  Top Layer w0.25: D2.1@67.963,51.163 D2.1@68.545,51.745
  Top Layer w1: L2.2@62.5,50.59 62.5,50.6 63.4,51.5 67.768,51.5 D2.1
NetD3_1: D3.1 R9.2 | length 3.3
  Top Layer w0.5: D3.1 R9.2
NetD3_3: D3.3 R8.2 | length 3.5
  Top Layer w0.5: D3.3 66.696,20.024 69.45,20.024 69.7,19.774 R8.2@69.7,19.7
NetD3_4: D3.4 R7.2 | length 3.3
  Top Layer w0.5: D3.4 69.45,17.68 R7.2 R7.2@69.7,17.4
NetL1_1: L1.1 U2.4
NetL1_2: L1.2 U2.2
NetQ1_1: Q1.1 R3.1 | length 2.9
  Top Layer w0.25: R3.1 55.65,51.538 Q1.1@55.65,54.138
NetQ1_2: Q1.2 Q2.2 | length 2.9
  Top Layer w1: Q1.2@55.65,56.038 Q2.2@55.65,58.888
NetQ2_1: Q2.1 R4.1 | length 4.6
  Top Layer w0.25: Q2.1 53.572,58.878 Q2.1@53.74,58.878 ; R4.1@49.9,58.838 R4.1@50.3,58.838 ; R4.1@49.9,58.838 R4.1@50.3,58.838 ; R4.1@49.9,58.838 R4.1@50.3,58.838
  Top Layer w0.5: R4.1@50.3,58.838 Q2.1@53.55,58.838
NetR2_2: R2.2 R3.2 U3.3 | length 5.4
  Top Layer w0.25: U3.3 48.545,51.996 48.637,52.088 50.7,52.088 50.85,52.088 51.6,51.338 R3.2
NetR16_2: R16.2 U9.2 | length 4.2
  Top Layer w0.25: U9.2 9.925,48.175 10.8,47.3 R16.2@12.8,47.3
NetR19_1: R19.1 U10.7 | length 18.2
  Top Layer w0.25: 31.1,12.4 U10.7
  Top Layer w0.5: R19.1 25.9,3.15 29.9,7.15 29.9,11.1 31.187,12.387
NetR21_1: R21.1 U10.6 | length 17.1
  Top Layer w0.25: 30.15,13.05 U10.6
  Top Layer w0.5: R21.1 25.9,5.35 26.15,5.6 26.29,5.6 28.7,8.01 28.7,11.7 29.958,12.958
NetSPK1_1: SPK1.1 U11.1 | length 7.7
  Top Layer w0.5: U11.1 14.248,13.105 14.325,13.028 14.325,12.993 14.918,12.4 20.94,12.4 SPK1.1
NetSPK1_2: SPK1.2 U11.3 | length 7.6
  Top Layer w0.5: U11.3 14.255,15.645 14.804,15.096 20.904,15.096 SPK1.2@21.1,14.9
NetSPK2_1: SPK2.1 U11.14 | length 4.9
  Top Layer w0.5: SPK2.1@3.9,14.4 5.126,15.626 8.306,15.626 U11.14
NetSPK2_2: SPK2.2 U11.16 | length 4.9
  Top Layer w0.5: SPK2.2@3.9,11.86 6.603,11.86 7.848,13.105 U11.16
NetU6_2: U6.2 U7.3 | length 7.8
  Top Layer w0.25: U6.2@36.135,60.225 36.135,60.65 37.635,62.15 ; 37.735,62.15 41.75,62.15 42.156,61.744 42.156,61.069 U7.3
PROG_CS: U7.5 U12.5 | length 14.7
  Top Layer w0.25: v1(41,47.6) 41,46.4 41.675,45.725 U12.5 ; v1(41,50.4) 41,50.603 41.5,51.103 41.5,55.929 41.506,55.935 41.506,56.512 U7.5@41.5,56.517
  Bottom Layer w0.25: v1(41,47.6) v1(41,50.4)
PROG_DATA: U7.8 U12.4 | length 14.7
  Top Layer w0.25: U12.4 42.325,47.272 42.55,47.497 v1(42.55,47.7) ; v1(42.5,50.4) 43.475,51.375 U7.8
  Bottom Layer w0.25: v1(42.5,50.4) 42.55,50.35 v1(42.55,47.7)
ROT_CLK: D7.1 SW3.1 U5.7 | length 18.5
  Top Layer w0.25: SW3.1 83.8,30 91.071,22.729 91.071,21.619 U5.7
  Top Layer w0.5: D7.1 77.072,30.16 SW3.1@80.6,30.16
ROT_DATA: D6.1 SW3.2 U5.6 | length 21.1
  Top Layer w0.25: SW3.2 82.36,32.54 92.19,22.71 92.19,21.77 U5.6
  Top Layer w0.5: D6.1 77.332,33.3 79.795,33.3 80.555,32.54 SW3.2
ROT_SW: D5.1 SW3.3 U5.5 | length 23.7
  Top Layer w0.25: SW3.3 80.92,35.08 93.405,22.595 93.405,21.825 U5.5
  Top Layer w0.5: D5.1 77.352,36.68 79,36.68 SW3.3
RXD0: J1.3 U5.34 | length 10.8
  Top Layer w0.25: J1.3 88.34,2 93.231,2 93.703,2.471 93.703,3.673 U5.34
SCL: R15.1 U5.37 U8.10 U9.4 U12.22 | length 167.8
  Top Layer w0.25: U9.4 8.625,48.625 4.9,44.9 4.9,39.6 6.2,38.3 42.1,38.3 42.975,37.425 U12.22@42.975,36.65 ; U9.4@8.636,49.472 8.636,51.036 10.6,53 26.6,53 27.4,53.8 27.4,58.7 26.201,59.899 25.101,59.899 24.5,60.5 U8.10 ; U12.22 42.975,35.097 43.872,34.2 53.7,34.2 55.5,36 R15.1 ; v1(59.1,32.3) 59.15,32.25 59.15,14.15 v1(59.2,14.1) ; v1(59.2,9.9) 59.221,9.9 60.021,9.1 93.142,9.1 97.359,4.883 97.359,3.881 U5.37
  Bottom Layer w0.2: v1@55.5,35.95 v1(55.5,36.1) ; v1(59.1,32.3) v1@59.1,32.35
  Bottom Layer w0.25: v1@55.5,35.95 v1@59.1,32.35 ; v1(59.2,9.9) v1(59.2,14.1)
SD_CS: J3.1 U5.29 | length 34.5
  Top Layer w0.25: v1(65.7,4.7) 66.7,5.7 86.5,5.7 87.271,4.929 87.271,3.809 U5.29
  Bottom Layer w0.25: J3.1 57.48,4.8 65.6,4.8 v1(65.7,4.7)
SDA: R14.1 U5.36 U8.9 U9.3 U12.23 | length 164.2
  Top Layer w0.25: U9.3@9.271,49.146 9.271,48.074 5.9,44.703 5.9,40.095 6.895,39.1 42.695,39.1 43.621,38.174 U12.23@43.621,36.454 ; U9.3@9.271,49.154 9.271,50.574 10.796,52.099 26.996,52.099 28.196,53.299 28.196,59.204 27.001,60.399 25.375,60.399 25.015,60.759 U8.9@25.015,60.975 ; U12.23@43.625,36.445 43.644,36.426 43.644,35.651 44.096,35.199 52.796,35.199 52.997,35.4 v1@53.197,35.4 ; v1@53.196,35.404 R14.1@53.196,37.696 ; v1(57.6,9.9) 59.2,8.3 92.6,8.3 96.017,4.883 96.017,3.953 U5.36 ; v1(57.6,14.1) v1(57.6,31.1)
  Bottom Layer w0.2: v1(53.2,35.4) v1@53.25,35.4 ; v1@57.55,31.1 v1(57.6,31.1)
  Bottom Layer w0.25: v1@53.25,35.4 v1@57.55,31.1 ; v1(57.6,9.9) v1(57.6,14.1)
SPI_MISO: J3.3 U5.31 | length 33.7
  Top Layer w0.25: J3.3 60.66,4.171 63.489,7 87.765,7 89.712,5.054 89.712,3.908 U5.31
SPI_MOSI: J2.6 J3.2 U5.33 | length 43.7
  Top Layer w0.25: J3.2 58.12,4.171 61.549,7.6 89.741,7.6 92.412,4.929 92.412,3.748 U5.33
  Bottom Layer w0.25: J3.2 59.8,1.22 J2.6
SPI_SCK: J2.7 J3.4 U5.30 | length 37.1
  Top Layer w0.25: J2.7 57.6,-0.8 59.5,1.1 61.745,1.1 63.2,2.555 63.2,4.171 65.429,6.4 87.095,6.4 88.567,4.929 88.567,3.783 U5.30
TXD0: J1.2 U5.35 | length 9.6
  Top Layer w0.25: J1.2 89.88,1 93.75,1 94.675,1.925 94.675,3.375 U5.35
VBAT: C14.2 C17.1 F1.2 Q1.3 R2.1 R17.2 U3.4 U6.5 U9.7 | length 70.2
  Top Layer w0.25: C17.1@8.8,42.8 9,43 9.9,43 ; U9.7@9.9,44.519 9.906,44.513 9.906,44.035 9.9,44.029 9.9,43 ; 12.275,41.075 12.275,42.125 12.65,42.5 R17.2@12.8,42.5 ; 25.7,41.12 11.78,41.12 9.9,43
  Top Layer w0.5: C14.2@31.6,54.4 33.649,54.4 33.695,54.446 U6.5
  Top Layer w1: F1.2 25.7,41.4 33.109,41.4 33.695,41.986 33.695,49 ; U6.5 33.695,49 ; U3.4 47.245,53.183 ; R2.1 48.162,54.1 47.245,53.183 ; R2.1@50.85,54.1 50.862,54.1 51.962,55.2 Q1.3 ; 33.695,49 43.062,49 47.245,53.183
VBUS: C15.2 C16.2 D1.1 D8.1 J6.1 R4.2 R5.1 R10.2 U7.1 U8.8 | length 33.2
  Top Layer w0.25: J6.1 J6.1@19.12,65.5 ; 20,64.62 J6.1@19.12,65.5 ; 25.4,63.8 25.5,63.7 U8.8 ; 25.5,63.8 25.5,65.354 25.354,65.5 J6.1@19.12,65.5 ; 42.1,65.2 43.475,63.825 U7.1 43.475,60.646 43.521,60.6 C15.2 ; 48.1,65.354 48.246,65.5 D1.1@50.931,65.5
  Top Layer w0.5: D8.1@20,61.032 20,64.62 ; C16.2 24.9,63.8 25.4,63.8 ; R4.2@48.1,58.945 48.1,65.354
VIN: J4.1 J7.2 J9.2 | length 29.2
  Top Layer w0.25: J4.1 J7.2
  Top Layer w1.5: J9.2 70.5,65.3
pads on no net: J2.9 U3.1 U5.17 U5.18 U5.19 U5.20 U5.21 U5.22 U5.27 U5.28 U5.32 U7.6 U7.7 U8.6 U8.7 U9.1 U12.6 U12.7 U12.13 U12.16 U12.17 U12.18 U12.19
copper on no net:
  other v2: 4,-1 96,-1 4,66 96,66

## Polygon pours and split planes (outlines as drawn)
GND on Top Layer "GND_L01_P025" (solid, pour order 25): 67.2,47.2 62.396,42.2 51.6,42.2 47.3,37.9 45,37.9 44.7,38.2 44.7,43.1 44.2,43.6 43,43.6 42.7,43.9 42.7,46.42 44.964,48.9 49,48.9 49.3,49.2 49.3,51 49.6,51.3 51,51.3 52.273,49.9 56.4,49.9 56.7,49.6 56.7,47.9 66.8,47.9
GND on Top Layer "GND_L01_P039" (solid, pour order 39): 43.8,41.3 43.7,41.4 36.4,41.4 35.4,40.4 11.5,40.4 10.5,41.4 8,41.4 7.7,41.7 7.7,44.6 7.4,44.9 6.8,44.9 6.5,44.6 6.5,40.2 7.1,39.6 43.3,39.6 43.8,40.1
GND on Top Layer "GND_L01_P037" (solid, pour order 37): 50.5,-4 50.5,2.8 49.9,3.4 27.3,3.4 26.9,3 26.9,1.9 26.7,1.7 12.7,1.7 8.2,6.2 8.2,9.1 7.3,10 2.1,10 1.7,10.4 1.7,23.1 11.3,32.7 29.5,32.7 29.5,32.8 31.1,34.4 35.8,34.4 36.6,35.2 36.6,37.585 36.4,37.7 36.2,37.7 5.9,37.7 4.3,39.3 4.3,45.5 4.6,45.5 8,48.9 8,51.5 10.2,53.7 24.2,53.7 24.7,54.2 24.7,55.8 24.1,56.4 24.1,57.7 23.7,58 4.6,58 4.2,58.4 4.2,61.6 3.7,62.1 1.1,62.1 0.6,61.6 0.6,-4.4 50.167,-4.4
GND on Top Layer "GND_L01_P035" (solid, pour order 35): 94.9,33.4 95.4,33.9 95.4,38.9 94.6,39.7 88.3,39.7 86.7,38.1 83.7,38.1 82.6,37 82.6,34.6 94.2,23 95.6,23 95.9,23.3 95.9,26.7 95.5,27.1 94.4,27.1 94.2,27.3 94.2,30.5 93.6,31.1 88.7,31.1 88.1,31.7 88.1,32.8 88.7,33.4
GND on Top Layer "GND_L01_P034" (solid, pour order 34): 99.5,48.8 99.3,49 93.7,49 93.2,48.417 93.2,44.867 93.7,44.2 95.2,44.2 95.6,43.8 95.6,42.2 96.1,41.7 97.3,41.7 97.6,41.4 97.6,35.7 98.5,34.8 98.5,22.6 99.4,22.6 99.5,22.5
GND on Top Layer "GND_L01_P033" (solid, pour order 33): 66.3,31.1 69.1,28.3 74.5,28.3 74.9,28.7 74.9,41.4 75.4,41.9 78.4,41.9 78.7,41.6 78.7,40.7 80.1,39.3 81.5,39.3 82.6,40.4 82.6,44.1 82.2,44.5 69.9,44.5 68.4,43 68.4,40.7 67.8,40.1 67.1,40.1 66.3,39.3
GND on Top Layer "GND_L01_P031" (solid, pour order 31): 7.6,23.5 7.6,25.8 12.2,30.4 25.5,30.4 25.9,29.7 19.7,23.5
GND on Top Layer "GND_L01_P030" (solid, pour order 30): 26.1,6.4 28,8.3 28,12.2 29.3,13.5 34,13.5 34,18.8 40.5,25.3 47.7,25.3 52.2,29.8 52.2,30.4 34.3,30.4 25.4,21.5 25.4,10.7 23.7,9 12.7,9 12.3,8.6 12.3,7.6 13.5,6.4
GND on Top Layer "GND_L01_P029" (solid, pour order 29): 53,27.1 49.4,23.5 49.4,16.988 49.688,16.7 53.6,16.7 54,17.1 54,27.1
GND on Top Layer "GND_L01_P028" (solid, pour order 28): 38.4,10 32.2,10 32,9.8 32,6.1 33.5,4.6 52.3,4.6 54.8,7.1 54.8,10.2 54.5,10.5 45.467,10.5 45.05,10 43,10 42.7,10.3 42.7,16.775 43,17 43.1,17 43.9,17 44.8,17.9 44.8,18.9 45,19.1 47.2,19.1 47.4,19.3 47.4,23.1 47,23.5 41.4,23.5 38.1,20.2 38.1,19.4 38.4,19.1 41.5,19.1 41.7,18.9 41.7,17.4 41.1,16.8 41.1,15.4 39.7,14 39,14 38.7,13.7 38.7,10.3
GND on Top Layer "GND_L01_P016" (solid, pour order 16): 88.648,55.656 88.646,55.657 88.646,55.873 87.827,55.873 87.825,55.875 87.875,55.925 87.9,60.1 87.9,60.6 87.4,61.2 83.2,61.2 81.8,59.8 81.8,59.2 82.1,58.9 84.8,58.9 85.1,58.6 85.1,49.5 85.7,48.9 87.1,48.9 87.8,49.6 87.825,54.575 87.825,55.65
GND on Top Layer "GND_L01_P026" (solid, pour order 26): 80.2,54.3 81.8,54.3 82.8,54.3 83.4,53.7 83.4,46.8 82.9,46.2 74.4,46.2 73.8,46.8 73.8,59.2 73.5,59.5 70.6,59.5 69.5,59.5 69.2,59.8 69.2,61.1 69.6,61.4 72.1,61.4 72.4,61.7 72.4,64.1 72.7,64.4 86.1,64.4 86.5,64 86.5,62.5 86.3,62.3 82.5,62.3 80.2,60 80.2,55.9
GND on Top Layer "GND_L01_P023" (solid, pour order 23): 98.35,22.5 98.35,19.125 98.05,18.75 90,18.75 81.149,9.899 93.981,9.901 98.25,5.2 98.25,2.5 99.5,2.5 99.5,11 99.5,22.5
GND on Top Layer "GND_L01_P024" (solid, pour order 24): 45,59.25 46.25,59.25 46.5,59 47,59 47.3,58.7 47.3,57.801 52.75,57.75 53.1,57.4 53.1,56.599 52.75,56.249 51.459,56.249 50.5,55.25 47.75,55.25 45,52.5 44,52.75 44,57.25 43.75,57.5 41.25,57.5 41,57.25 41,51.75 40.75,51.5 39,51.5 38.75,51.75 38.75,55.75 38.25,56 30.75,56 30.75,58 31.85,59.1 38,59.1 38.3,59.4 38.3,61.3 38.75,61.75 40,61.75 40.5,61.25 40.5,60 44.5,60
NetC8_2 on Top Layer "NETC8_2_L01_P006" (solid, pour order 6): 71.4,59 71.3,58.9 71.3,57.6 70.9,57.2 70.3,57.2 70.1,57 70.1,53.3 70.8,52.6 70.8,47.3 71.3,46.8 72.4,46.8 72.8,47.2 72.8,48.8 73.4,49.8 73.4,58.9 73.3,59
NetL1_1 on Top Layer "NETL1_1_L01_P021" (solid, pour order 21): 88.566,56.144 88.561,56.149 88.561,56.381 89.696,56.381 92.58,59.266 92.58,59.325 93.48,59.325 93.68,59.125 93.68,58.125 92.78,58.125 90.785,56.13 90.763,56.13
NetL1_2 on Top Layer "NETL1_2_L01_P020" (solid, pour order 20): 88.585,55.381 88.58,55.376 88.58,55.144 89.716,55.144 92.6,52.26 92.6,52.2 93.5,52.2 93.7,52.4 93.7,53.4 92.8,53.4 90.805,55.395 90.783,55.395
NetC3_2 on Top Layer "NETC3_2_L01_P018" (solid, pour order 18): 89.2,64.4 87.6,64.4 87.4,64.2 87.4,62.7 87.7,62.4 89.2,62.4 89.406,62.606 89.406,64.194
GND on Top Layer "GND_L01_P005" (solid, pour order 5): 69.4,59.102 69,58.702 67.3,58.702 67.1,58.502 67.1,57.402 68.1,56.402 68.1,55.202 68.502,54.8 69,54.8 69.2,54.6 69.2,53.302 69.3,53.202 69.7,53.2 69.8,53.3 69.8,57.4 70.497,57.7 70.497,59.005 70.4,59.102
NetC4_2 on Top Layer "NETC4_2_L01_P014" (solid, pour order 14): 89.4,54.4 89.025,54.8 88.275,54.8 88.15,54.7 88.15,47 88.575,46.7 89.575,46.7 90,47.125 90,48.117 89.4,48.617
NetC3_2 on Top Layer "NETC3_2_L01_P012" (solid, pour order 12): 88.25,56.725 89.025,56.725 89.2,56.9 89.2,58.7 88.2,58.7 88.2,56.775
VIN on Top Layer "VIN_L01_P011" (solid, pour order 11): 60.7,67.2 60.4,66.9 60.4,65.2 60.7,64.9 89.1,64.9 89.5,65.3 89.5,66.8 89.1,67.2
NetD2_1 on Top Layer "NETD2_1_L01_P008" (solid, pour order 8): 68.9,51.7 68.9,54.4 68.8,54.5 68,54.5 67.9,54.4 67.9,51.7
NetD1_2 on Top Layer "NETD1_2_L01_P009" (solid, pour order 9): 59.14,67.2 53.7,67.2 53.1,66.6 53.1,65.4 53.7,64.8 59.2,64.8 59.8,65.4 59.8,66.65
VBUS on Top Layer "VBUS_L01_P003" (solid, pour order 3): 17.88,67.3 17.39,66.81 17.39,65.11 17.8,64.7 50.7,64.7 51.6,65.11 51.6,66.9 50.9,67.3
VBUS on Top Layer "VBUS_L01_P001" (solid, pour order 1): 29.4,64.75 29.4,63.75 31.4,63.75 31.4,64.75
GND on Bottom Layer "GND_L02_P038" (solid, pour order 38): 0.5,69.5 0.5,-4.5 99.5,-4.5 99.5,69.5

## Silkscreen, mask and mechanical layers (free items; w line width, h text height)
Top Overlay:
  text "CC2" at 14.154,67.754 h1.52
  text "R10" at 28.754,65.554 h1.52
  text "CC1" at 11.854,62.754 h1.52
  text "+3.3V" at 78.054,62.554 h1.52
  text "+5V" at 61.7,62.3 h1.52
  text "PORTAL PCB V1" at 1.754,34.354 h1.52
Mechanical 1:
  circle w0.254: c4,-1 r3
  circle w0.254: c96,66 r3
  circle w0.254: c4,66 r3
  circle w0.254: c96,-1 r3